# Altium PCB PCB.PcbDoc
Units mm, origin at the board's own origin, x right, y up, seen from the top; angles counter-clockwise.
Board outline 71 x 108 mm, 2 copper layers (Top Layer, Bottom Layer), stack 1.571 mm thick; 8 components, 66 nets, 302 pads, 0 vias.
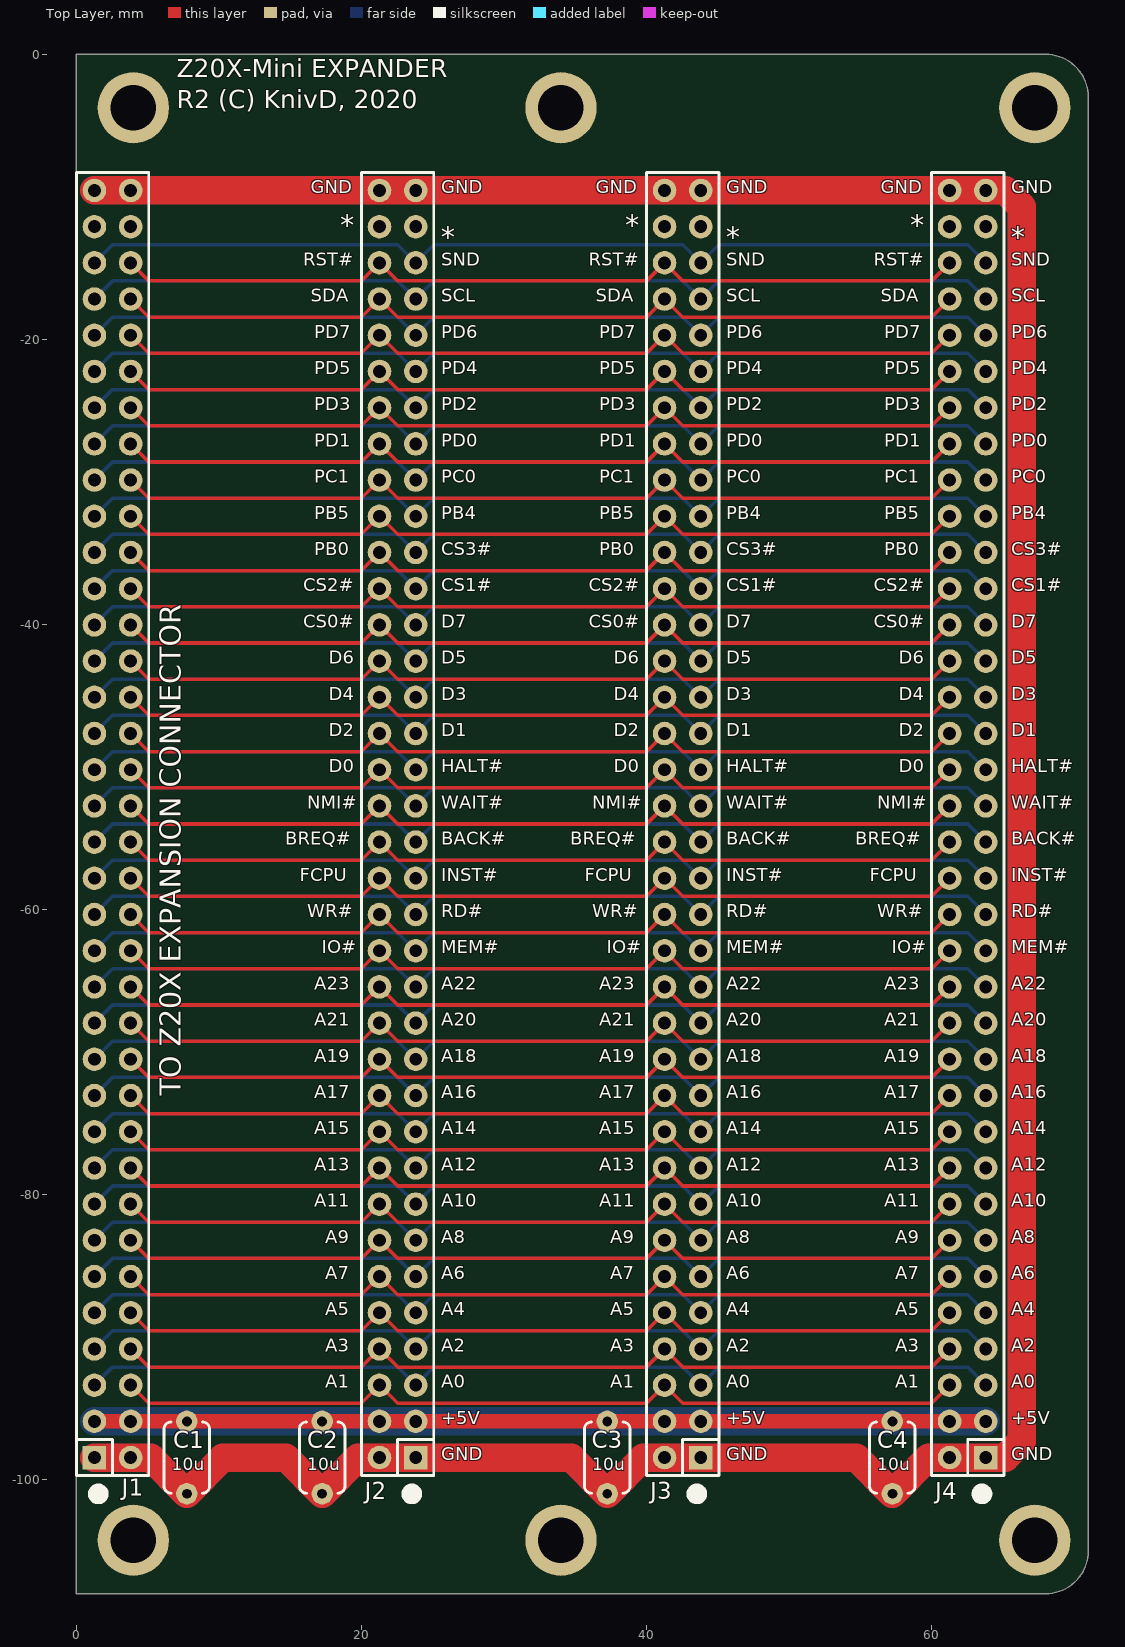
[diagram p0: Top Layer view]
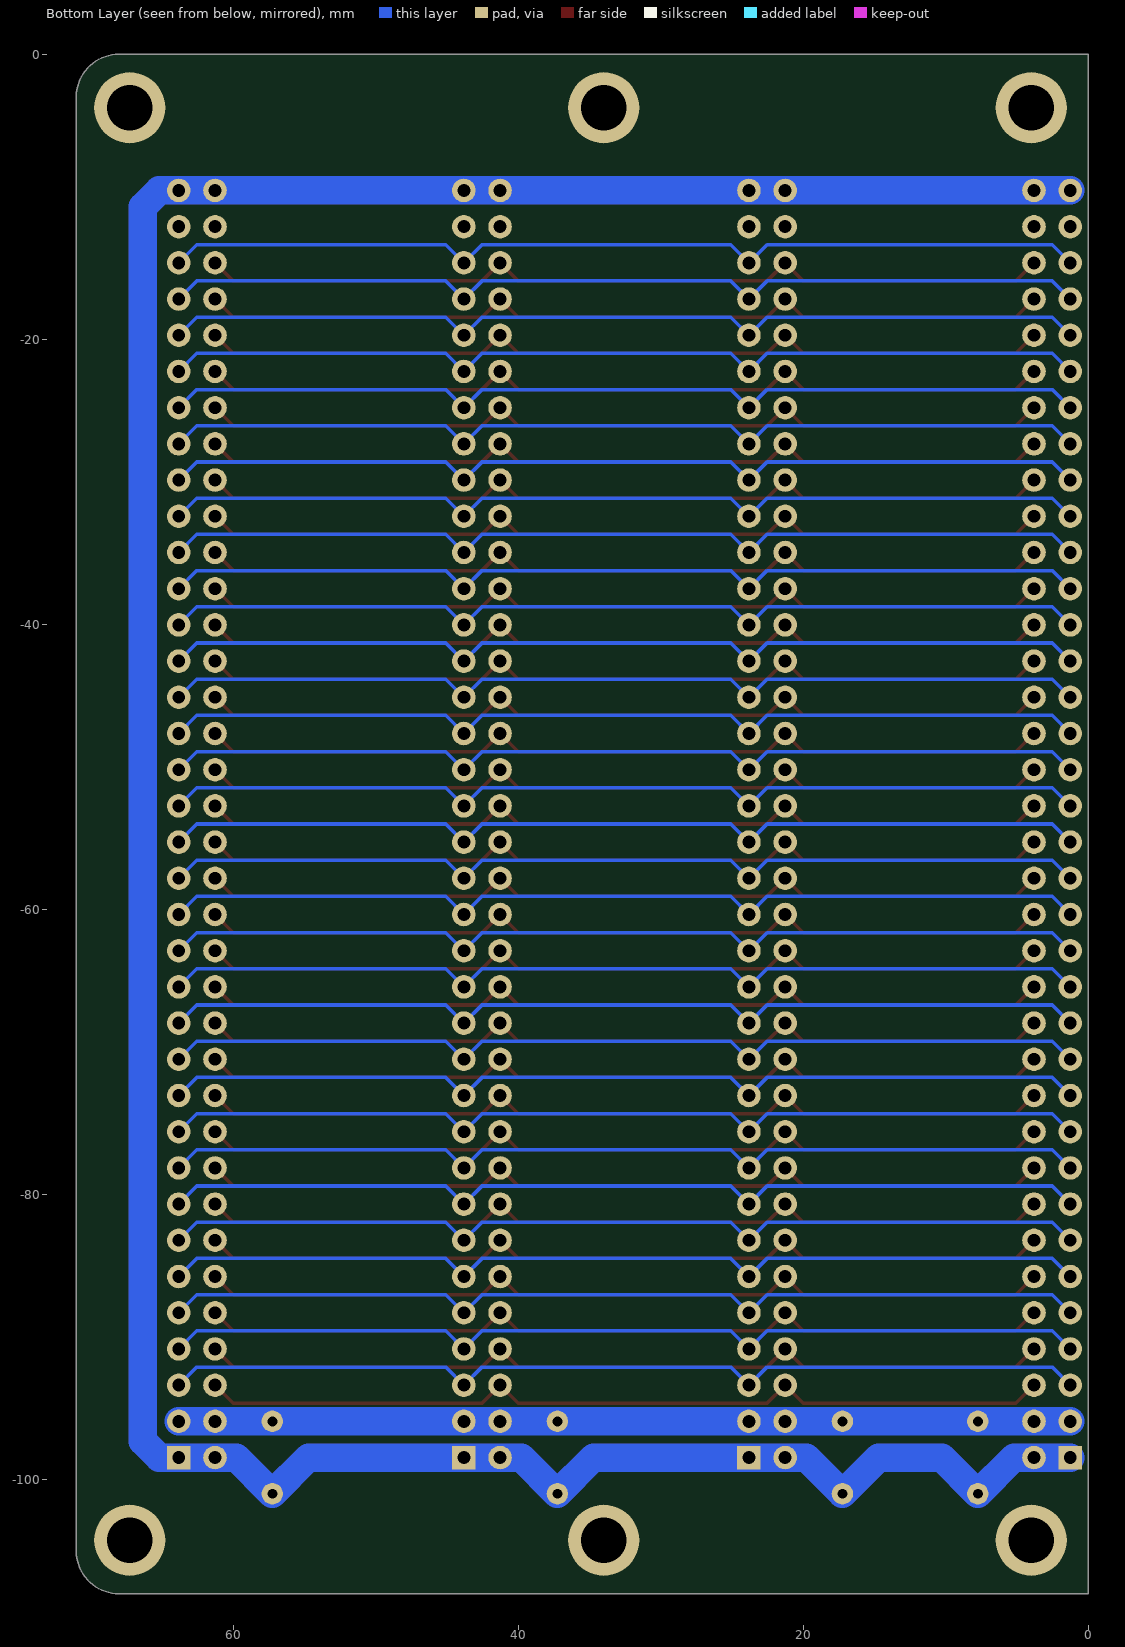
[diagram p1: Bottom Layer view, seen from below]

## Layer stack, top to bottom
Top Solder: solder mask 0.0102, Solder Resist, Dk 3.5
Top Layer: signal copper 0.0356
Dielectric 1: core 1.5, FR-4, Dk 4.2
Bottom Layer: signal copper 0.0356
Solder Side: solder mask 0.0102, Solder Resist, Dk 3.5

## Board outline
0,-108 68,-108 ccw(c68,-105) 71,-105 71,-3 ccw(c68,-3) 68,0 0,0

## Design rules (kind name [scope] priority, off if disabled: settings)
Clearance Clearance_U1 [(InComponent('U1') OR InComponent('U2') OR InComponent('U3'))] p1: gap=0.2 ignorepadtopadclearanceinfootprint=TRUE
Clearance Clearance_Poly [(IsRegion)] p2: gap=0.5 ignorepadtopadclearanceinfootprint=TRUE
Clearance [All] p3: gap=0.25 ignorepadtopadclearanceinfootprint=TRUE
DiffPairsRouting [All] p1: maxlimit=1 minlimit=0.15 mostfreqgap=0.2 toplayer_minwidth=0.2 toplayer_maxwidth=1 toplayer_prefwidth=0.2 bottomlayer_minwidth=0.2 bottomlayer_maxwidth=1 bottomlayer_prefwidth=0.2 maxuncoupledlength=12.7
HoleSize [All] p1 off: absolutevalues=TRUE maxlimit=2.5 minlimit=0.025 maxpercent=80.000 minpercent=20.000
HoleToHoleClearance [All] p1 off: gap=0 allowstackedmicrovias=TRUE
LayerPairs [All] p1 off: enforce=TRUE
MaxMinImpedance [InNet('ANT50R')] p1: minimum=49.90 maximum=50.10
MinimumSolderMaskSliver [All] p1 off: minsoldermaskwidth=-50
NetAntennae [All] p1 off: netantennaetolerance=0
PlaneClearance [All] p1: clearance=0.5
PlaneConnect [All] p1: planeconnectstyle=Direct reliefexpansion=0.5 reliefentries=4 reliefconductorwidth=0.35 reliefairgap=0.35
PolygonConnect [All] p1: thpad.connectstyle=Relief thpad.reliefconductorwidth=0.25 thpad.reliefentries=4 thpad.polygonreliefangle="90 Angle" thpad.airgapwidth=0.35 smdpad.connectstyle=Relief smdpad.reliefconductorwidth=0.25 smdpad.reliefentries=4 smdpad.polygonreliefangle="90 Angle" smdpad.airgapwidth=0.35 via.connectstyle=Direct via.reliefconductorwidth=0.35 via.reliefentries=4 via.polygonreliefangle="90 Angle" via.airgapwidth=0.35
RoutingCorners [All] p1: cornerstyle=45-Degree minsetback=2 maxsetback=2
RoutingVias [All] p1: holewidth=0.3 width=0.6 viastyle="Through Hole" minholewidth=0.3 minwidth=0.6 maxholewidth=1 maxwidth=2
SilkToBoardRegionClearance [All] p1 off:
SilkToSilkClearance [All] p1 off: silktosilkclearance=-50
SilkToSolderMaskClearance [IsPad] p1 off: minsilkscreentomaskgap=-50 clearancetoexposedcopper=TRUE
SolderMaskExpansion [All] p1: expansion=0.102
Width [All] p1: maxlimit=5 minlimit=0.2 preferedwidth=0.25
18 further rules are at their usual default settings.

## Components (designator, comment, footprint, x,y, rotation, side; value= is the part's Value field where it differs from the comment)
C1 "10u" CAPRR508-350X500X500 7.75,-98.45 r270 top locked
C2 "10u" CAPRR508-350X500X500 17.25,-98.45 r270 top locked
C3 "10u" CAPRR508-350X500X500 37.25,-98.45 r270 top locked
C4 "10u" CAPRR508-350X500X500 57.25,-98.45 r270 top locked
J1 "" 2011-2X36S-F#1 2.54,-54 r90 top locked
J2 "" 2011-2X36S-F#2 22.54,-54 r90 top locked
J3 "" 2011-2X36S-F#2 42.54,-54 r90 top locked
J4 "" 2011-2X36S-F#2 62.54,-54 r90 top locked

## Footprints (in the part's own frame and the unit in brackets; to place one, negate y for a bottom-side part, rotate by r counter-clockwise, add the part's x,y. Pads: shape width x height; smd on the part's side, far side on the other; paste and mask are expansions set on the pad)
2011-2X36S-F#1 [mil] "2011-2X36 Straight Pin Header"
  rect 65x65 hole 35.43: 1(-1750,50)
  round 65 hole 35.43: 2(-1750,-50) 3(-1650,50) 4(-1650,-50) 5(-1550,50) 6(-1550,-50) 7(-1450,50) 8(-1450,-50) 9(-1350,50) 10(-1350,-50) 11(-1250,50) 12(-1250,-50) 13(-1150,50) 14(-1150,-50) 15(-1050,50) 16(-1050,-50) 17(-950,50) 18(-950,-50) 19(-850,50) 20(-850,-50) 21(-750,50) 22(-750,-50) 23(-650,50) 24(-650,-50) 25(-550,50) 26(-550,-50) 27(-450,50) 28(-450,-50) 29(-350,50) 30(-350,-50) 31(-250,50) 32(-250,-50) 33(-150,50) 34(-150,-50) 35(-50,50) 36(-50,-50) 37(50,50) 38(50,-50) 39(150,50) 40(150,-50) 41(250,50) 42(250,-50) 43(350,50) 44(350,-50) 45(450,50) 46(450,-50) 47(550,50) 48(550,-50) 49(650,50) 50(650,-50) 51(750,50) 52(750,-50) 53(850,50) 54(850,-50) 55(950,50) 56(950,-50) 57(1050,50) 58(1050,-50) 59(1150,50) 60(1150,-50) 61(1250,50) 62(1250,-50) 63(1350,50) 64(1350,-50) 65(1450,50) 66(1450,-50) 67(1550,50) 68(1550,-50) 69(1650,50) 70(1650,-50) 71(1750,50) 72(1750,-50)
  silkscreen extent -1800,-100 1800,100, body extent -1810,-98 1810,98, height 118
2011-2X36S-F#2 [mil] "2011-2X36 Straight Pin Header"
  rect 65x65 hole 35.43: 1(-1750,-50)
  round 65 hole 35.43: 2(-1750,50) 3(-1650,-50) 4(-1650,50) 5(-1550,-50) 6(-1550,50) 7(-1450,-50) 8(-1450,50) 9(-1350,-50) 10(-1350,50) 11(-1250,-50) 12(-1250,50) 13(-1150,-50) 14(-1150,50) 15(-1050,-50) 16(-1050,50) 17(-950,-50) 18(-950,50) 19(-850,-50) 20(-850,50) 21(-750,-50) 22(-750,50) 23(-650,-50) 24(-650,50) 25(-550,-50) 26(-550,50) 27(-450,-50) 28(-450,50) 29(-350,-50) 30(-350,50) 31(-250,-50) 32(-250,50) 33(-150,-50) 34(-150,50) 35(-50,-50) 36(-50,50) 37(50,-50) 38(50,50) 39(150,-50) 40(150,50) 41(250,-50) 42(250,50) 43(350,-50) 44(350,50) 45(450,-50) 46(450,50) 47(550,-50) 48(550,50) 49(650,-50) 50(650,50) 51(750,-50) 52(750,50) 53(850,-50) 54(850,50) 55(950,-50) 56(950,50) 57(1050,-50) 58(1050,50) 59(1150,-50) 60(1150,50) 61(1250,-50) 62(1250,50) 63(1350,-50) 64(1350,50) 65(1450,-50) 66(1450,50) 67(1550,-50) 68(1550,50) 69(1650,-50) 70(1650,50) 71(1750,-50) 72(1750,50)
  silkscreen extent -1800,-100 1800,100, body extent -1810,-98 1810,98, height 335
CAPRR508-350X500X500 [mm] "Capacitor Radial Rounded, Pin spacing 5.08mm - Body With 3.2mm X Body Length 5.0mm X Body Height 5.0mm"
  round 1.5 hole 0.7: 1(-2.54,0) 2(2.54,0)
  silkscreen extent -2.5,-1.6 2.5,1.6, body extent -2.79,-1.75 2.79,1.75, height 5

## Part data
C1 C2 C3 C4: library part Capacitor, "Capacitor"
J1 J2 J3 J4: library part "Connector 2x36", "Dual row, 72-way connector"

## Free pads (board coordinates)
  round 5 hole 3.2: 0(4,-104.25) 0(4,-3.75) 0(34,-104.25) 0(34,-3.75) 0(67.25,-104.25) 0(67.25,-3.75)

## Nets (pads, with @x,y where several pads share a name; then routed paths per layer and width w, separated by ;. In a path a pad name is that pad's centre, name@x,y a point inside that pad or via, vN(x,y) a via of type N, cw(c..) or ccw(c..) an arc to the next point about the centre after c; other vN are vias at no path point)
+5V0: C1.1 C2.1 C3.1 C4.1 J1.3 J1.4 J2.3 J2.4 J3.3 J3.4 J4.3 J4.4 | length 125.1
  Top Layer w1: J1.3 J1.4 C1.1 C2.1 J2.4 J2.3 C3.1 J3.4 J3.3 C4.1 J4.4 J4.3
  Bottom Layer w2: J1.3 J1.4 C1.1 C2.1 J2.4 J2.3 C3.1 J3.4 J3.3 C4.1 J4.4 J4.3
A0: J1.5 J2.5 J3.5 J4.5 | length 65.7
  Bottom Layer w0.25: J1.5 2.54,-92.1 22.54,-92.1 J2.5 25.08,-92.1 42.54,-92.1 J3.5 45.08,-92.1 62.54,-92.1 J4.5
A1: J1.6 J2.6 J3.6 J4.6 | length 60.6
  Top Layer w0.25: J1.6 5.08,-94.64 20,-94.64 J2.6 22.54,-94.64 40,-94.64 J3.6 42.54,-94.64 60,-94.64 J4.6
A2: J1.7 J2.7 J3.7 J4.7 | length 65.7
  Bottom Layer w0.25: J1.7 2.54,-89.56 22.54,-89.56 J2.7 25.08,-89.56 42.54,-89.56 J3.7 45.08,-89.56 62.54,-89.56 J4.7
A3: J1.8 J2.8 J3.8 J4.8 | length 60.6
  Top Layer w0.25: J1.8 5.08,-92.1 20,-92.1 J2.8 22.54,-92.1 40,-92.1 J3.8 42.54,-92.1 60,-92.1 J4.8
A4: J1.9 J2.9 J3.9 J4.9 | length 65.7
  Bottom Layer w0.25: J1.9 2.54,-87.02 22.54,-87.02 J2.9 25.08,-87.02 42.54,-87.02 J3.9 45.08,-87.02 62.54,-87.02 J4.9
A5: J1.10 J2.10 J3.10 J4.10 | length 60.6
  Top Layer w0.25: J1.10 5.08,-89.56 20,-89.56 J2.10 22.54,-89.56 40,-89.56 J3.10 42.54,-89.56 60,-89.56 J4.10
A6: J1.11 J2.11 J3.11 J4.11 | length 65.7
  Bottom Layer w0.25: J1.11 2.54,-84.48 22.54,-84.48 J2.11 25.08,-84.48 42.54,-84.48 J3.11 45.08,-84.48 62.54,-84.48 J4.11
A7: J1.12 J2.12 J3.12 J4.12 | length 60.6
  Top Layer w0.25: J1.12 5.08,-87.02 20,-87.02 J2.12 22.54,-87.02 40,-87.02 J3.12 42.54,-87.02 60,-87.02 J4.12
A8: J1.13 J2.13 J3.13 J4.13 | length 65.8
  Top Layer w0.25: J4.13 J4.13@63.85,-83.25
  Bottom Layer w0.25: J1.13 2.54,-81.94 22.54,-81.94 J2.13 25.08,-81.94 42.54,-81.94 J3.13 45.08,-81.94 62.54,-81.94 J4.13
A9: J1.14 J2.14 J3.14 J4.14 | length 60.6
  Top Layer w0.25: J1.14 5.08,-84.48 20,-84.48 J2.14 22.54,-84.48 40,-84.48 J3.14 42.54,-84.48 60,-84.48 J4.14
A10: J1.15 J2.15 J3.15 J4.15 | length 65.7
  Bottom Layer w0.25: J1.15 2.54,-79.4 22.54,-79.4 J2.15 25.08,-79.4 42.54,-79.4 J3.15 45.08,-79.4 62.54,-79.4 J4.15
A11: J1.16 J2.16 J3.16 J4.16 | length 60.6
  Top Layer w0.25: J1.16 5.08,-81.94 20,-81.94 J2.16 22.54,-81.94 40,-81.94 J3.16 42.54,-81.94 60,-81.94 J4.16
A12: J1.17 J2.17 J3.17 J4.17 | length 65.7
  Bottom Layer w0.25: J1.17 2.54,-76.86 22.54,-76.86 J2.17 25.08,-76.86 42.54,-76.86 J3.17 45.08,-76.86 62.54,-76.86 J4.17
A13: J1.18 J2.18 J3.18 J4.18 | length 60.6
  Top Layer w0.25: J1.18 5.08,-79.4 20,-79.4 J2.18 22.54,-79.4 40,-79.4 J3.18 42.54,-79.4 60,-79.4 J4.18
A14: J1.19 J2.19 J3.19 J4.19 | length 65.7
  Bottom Layer w0.25: J1.19 2.54,-74.32 22.54,-74.32 J2.19 25.08,-74.32 42.54,-74.32 J3.19 45.08,-74.32 62.54,-74.32 J4.19
A15: J1.20 J2.20 J3.20 J4.20 | length 60.6
  Top Layer w0.25: J1.20 5.08,-76.86 20,-76.86 J2.20 22.54,-76.86 40,-76.86 J3.20 42.54,-76.86 60,-76.86 J4.20
A16: J1.21 J2.21 J3.21 J4.21 | length 65.7
  Bottom Layer w0.25: J1.21 2.54,-71.78 22.54,-71.78 J2.21 25.08,-71.78 42.54,-71.78 J3.21 45.08,-71.78 62.54,-71.78 J4.21
A17: J1.22 J2.22 J3.22 J4.22 | length 60.6
  Top Layer w0.25: J1.22 5.08,-74.32 20,-74.32 J2.22 22.54,-74.32 40,-74.32 J3.22 42.54,-74.32 60,-74.32 J4.22
A18: J1.23 J2.23 J3.23 J4.23 | length 65.7
  Bottom Layer w0.25: J1.23 2.54,-69.24 22.54,-69.24 J2.23 25.08,-69.24 42.54,-69.24 J3.23 45.08,-69.24 62.54,-69.24 J4.23
A19: J1.24 J2.24 J3.24 J4.24 | length 60.6
  Top Layer w0.25: J1.24 5.08,-71.78 20,-71.78 J2.24 22.54,-71.78 40,-71.78 J3.24 42.54,-71.78 60,-71.78 J4.24
A20: J1.25 J2.25 J3.25 J4.25 | length 66
  Top Layer w0.25: J4.25 J4.25@64.105,-67.97
  Bottom Layer w0.25: J1.25 2.54,-66.7 22.54,-66.7 J2.25 25.08,-66.7 42.54,-66.7 J3.25 45.08,-66.7 62.54,-66.7 J4.25
A21: J1.26 J2.26 J3.26 J4.26 | length 60.6
  Top Layer w0.25: J1.26 5.08,-69.24 20,-69.24 J2.26 22.54,-69.24 40,-69.24 J3.26 42.54,-69.24 60,-69.24 J4.26
A22: J1.27 J2.27 J3.27 J4.27 | length 65.8
  Top Layer w0.25: J4.27 J4.27@63.88,-65.5
  Bottom Layer w0.25: J1.27 2.54,-64.16 22.54,-64.16 J2.27 25.08,-64.16 42.54,-64.16 J3.27 45.08,-64.16 62.54,-64.16 J4.27
A23: J1.28 J2.28 J3.28 J4.28 | length 60.6
  Top Layer w0.25: J1.28 5.08,-66.7 20,-66.7 J2.28 22.54,-66.7 40,-66.7 J3.28 42.54,-66.7 60,-66.7 J4.28
BACK#: J1.35 J2.35 J3.35 J4.35 | length 65.7
  Bottom Layer w0.25: J1.35 2.54,-54 22.54,-54 J2.35 25.08,-54 42.54,-54 J3.35 45.08,-54 62.54,-54 J4.35
BREQ#: J1.36 J2.36 J3.36 J4.36 | length 60.6
  Top Layer w0.25: J1.36 5.08,-56.54 20,-56.54 J2.36 22.54,-56.54 40,-56.54 J3.36 42.54,-56.54 60,-56.54 J4.36
CS0#: J1.48 J2.48 J3.48 J4.48 | length 60.6
  Top Layer w0.25: J1.48 5.08,-41.3 20,-41.3 J2.48 22.54,-41.3 40,-41.3 J3.48 42.54,-41.3 60,-41.3 J4.48
CS1#: J1.49 J2.49 J3.49 J4.49 | length 65.7
  Bottom Layer w0.25: J1.49 2.54,-36.22 22.54,-36.22 J2.49 25.08,-36.22 42.54,-36.22 J3.49 45.08,-36.22 62.54,-36.22 J4.49
CS2#: J1.50 J2.50 J3.50 J4.50 | length 60.6
  Top Layer w0.25: J1.50 5.08,-38.76 20,-38.76 J2.50 22.54,-38.76 40,-38.76 J3.50 42.54,-38.76 60,-38.76 J4.50
CS3#: J1.51 J2.51 J3.51 J4.51 | length 65.7
  Bottom Layer w0.25: J1.51 2.54,-33.68 22.54,-33.68 J2.51 25.08,-33.68 42.54,-33.68 J3.51 45.08,-33.68 62.54,-33.68 J4.51
D0: J1.40 J2.40 J3.40 J4.40 | length 60.6
  Top Layer w0.25: J1.40 5.08,-51.46 20,-51.46 J2.40 22.54,-51.46 40,-51.46 J3.40 42.54,-51.46 60,-51.46 J4.40
D1: J1.41 J2.41 J3.41 J4.41 | length 65.7
  Bottom Layer w0.25: J1.41 2.54,-46.38 22.54,-46.38 J2.41 25.08,-46.38 42.54,-46.38 J3.41 45.08,-46.38 62.54,-46.38 J4.41
D2: J1.42 J2.42 J3.42 J4.42 | length 60.6
  Top Layer w0.25: J1.42 5.08,-48.92 20,-48.92 J2.42 22.54,-48.92 40,-48.92 J3.42 42.54,-48.92 60,-48.92 J4.42
D3: J1.43 J2.43 J3.43 J4.43 | length 65.7
  Bottom Layer w0.25: J1.43 2.54,-43.84 22.54,-43.84 J2.43 25.08,-43.84 42.54,-43.84 J3.43 45.08,-43.84 62.54,-43.84 J4.43
D4: J1.44 J2.44 J3.44 J4.44 | length 60.6
  Top Layer w0.25: J1.44 5.08,-46.38 20,-46.38 J2.44 22.54,-46.38 40,-46.38 J3.44 42.54,-46.38 60,-46.38 J4.44
D5: J1.45 J2.45 J3.45 J4.45 | length 65.7
  Bottom Layer w0.25: J1.45 2.54,-41.3 22.54,-41.3 J2.45 25.08,-41.3 42.54,-41.3 J3.45 45.08,-41.3 62.54,-41.3 J4.45
D6: J1.46 J2.46 J3.46 J4.46 | length 60.6
  Top Layer w0.25: J1.46 5.08,-43.84 20,-43.84 J2.46 22.54,-43.84 40,-43.84 J3.46 42.54,-43.84 60,-43.84 J4.46
D7: J1.47 J2.47 J3.47 J4.47 | length 65.7
  Bottom Layer w0.25: J1.47 2.54,-38.76 22.54,-38.76 J2.47 25.08,-38.76 42.54,-38.76 J3.47 45.08,-38.76 62.54,-38.76 J4.47
FCPU: J1.34 J2.34 J3.34 J4.34 | length 60.6
  Top Layer w0.25: J1.34 5.08,-59.08 20,-59.08 J2.34 22.54,-59.08 40,-59.08 J3.34 42.54,-59.08 60,-59.08 J4.34
GND: C1.2 C2.2 C3.2 C4.2 J1.1 J1.2 J1.71 J1.72 J2.1 J2.2 J2.71 J2.72 J3.1 J3.2 J3.71 J3.72 J4.1 J4.2 J4.71 J4.72 | length 452.2
  Top Layer w2: J1.1 J1.2 5.21,-98.45 C1.2 10.29,-98.45 14.71,-98.45 C2.2 19.79,-98.45 J2.2 J2.1 34.71,-98.45 C3.2 39.79,-98.45 J3.2 J3.1 54.71,-98.45 C4.2 59.79,-98.45 J4.2 J4.1 65.175,-98.45 66.325,-97.3 66.325,-10.7 65.175,-9.55 J4.71 J4.72 J3.71 J3.72 J2.71 J2.72 J1.72 J1.71
  Bottom Layer w2: J1.1 J1.2 5.21,-98.45 C1.2 10.29,-98.45 14.71,-98.45 C2.2 19.79,-98.45 J2.2 J2.1 34.71,-98.45 C3.2 39.79,-98.45 J3.2 J3.1 54.71,-98.45 C4.2 59.79,-98.45 J4.2 J4.1 65.175,-98.45 66.325,-97.3 66.325,-10.7 65.175,-9.55 J4.71 J4.72 J3.71 J3.72 J2.71 J2.72 J1.72 J1.71
HALT#: J1.39 J2.39 J3.39 J4.39 | length 65.7
  Bottom Layer w0.25: J1.39 2.54,-48.92 22.54,-48.92 J2.39 25.08,-48.92 42.54,-48.92 J3.39 45.08,-48.92 62.54,-48.92 J4.39
INST#: J1.33 J2.33 J3.33 J4.33 | length 65.7
  Bottom Layer w0.25: J1.33 2.54,-56.54 22.54,-56.54 J2.33 25.08,-56.54 42.54,-56.54 J3.33 45.08,-56.54 62.54,-56.54 J4.33
IO#: J1.30 J2.30 J3.30 J4.30 | length 60.6
  Top Layer w0.25: J1.30 5.08,-64.16 20,-64.16 J2.30 22.54,-64.16 40,-64.16 J3.30 42.54,-64.16 60,-64.16 J4.30
MEM#: J1.29 J2.29 J3.29 J4.29 | length 65.7
  Bottom Layer w0.25: J1.29 2.54,-61.62 22.54,-61.62 J2.29 25.08,-61.62 42.54,-61.62 J3.29 45.08,-61.62 62.54,-61.62 J4.29
NMI#: J1.38 J2.38 J3.38 J4.38 | length 60.6
  Top Layer w0.25: J1.38 5.08,-54 20,-54 J2.38 22.54,-54 40,-54 J3.38 42.54,-54 60,-54 J4.38
PB0: J1.52 J2.52 J3.52 J4.52 | length 60.6
  Top Layer w0.25: J1.52 5.08,-36.22 20,-36.22 J2.52 22.54,-36.22 40,-36.22 J3.52 42.54,-36.22 60,-36.22 J4.52
PB4: J1.53 J2.53 J3.53 J4.53 | length 65.7
  Bottom Layer w0.25: J1.53 2.54,-31.14 22.54,-31.14 J2.53 25.08,-31.14 42.54,-31.14 J3.53 45.08,-31.14 62.54,-31.14 J4.53
PB5: J1.54 J2.54 J3.54 J4.54 | length 60.6
  Top Layer w0.25: J1.54 5.08,-33.68 20,-33.68 J2.54 22.54,-33.68 40,-33.68 J3.54 42.54,-33.68 60,-33.68 J4.54
PC0: J1.55 J2.55 J3.55 J4.55 | length 65.7
  Bottom Layer w0.25: J1.55 2.54,-28.6 22.54,-28.6 J2.55 25.08,-28.6 42.54,-28.6 J3.55 45.08,-28.6 62.54,-28.6 J4.55
PC1: J1.56 J2.56 J3.56 J4.56 | length 60.6
  Top Layer w0.25: J1.56 5.08,-31.14 20,-31.14 J2.56 22.54,-31.14 40,-31.14 J3.56 42.54,-31.14 60,-31.14 J4.56
PD0: J1.57 J2.57 J3.57 J4.57 | length 65.7
  Bottom Layer w0.25: J1.57 2.54,-26.06 22.54,-26.06 J2.57 25.08,-26.06 42.54,-26.06 J3.57 45.08,-26.06 62.54,-26.06 J4.57
PD1: J1.58 J2.58 J3.58 J4.58 | length 60.6
  Top Layer w0.25: J1.58 5.08,-28.6 20,-28.6 J2.58 22.54,-28.6 40,-28.6 J3.58 42.54,-28.6 60,-28.6 J4.58
PD2: J1.59 J2.59 J3.59 J4.59 | length 65.7
  Bottom Layer w0.25: J1.59 2.54,-23.52 22.54,-23.52 J2.59 25.08,-23.52 42.54,-23.52 J3.59 45.08,-23.52 62.54,-23.52 J4.59
PD3: J1.60 J2.60 J3.60 J4.60 | length 60.6
  Top Layer w0.25: J1.60 5.08,-26.06 20,-26.06 J2.60 22.54,-26.06 40,-26.06 J3.60 42.54,-26.06 60,-26.06 J4.60
PD4: J1.61 J2.61 J3.61 J4.61 | length 65.7
  Bottom Layer w0.25: J1.61 2.54,-20.98 22.54,-20.98 J2.61 25.08,-20.98 42.54,-20.98 J3.61 45.08,-20.98 62.54,-20.98 J4.61
PD5: J1.62 J2.62 J3.62 J4.62 | length 60.6
  Top Layer w0.25: J1.62 5.08,-23.52 20,-23.52 J2.62 22.54,-23.52 40,-23.52 J3.62 42.54,-23.52 60,-23.52 J4.62
PD6: J1.63 J2.63 J3.63 J4.63 | length 65.7
  Bottom Layer w0.25: J1.63 2.54,-18.44 22.54,-18.44 J2.63 25.08,-18.44 42.54,-18.44 J3.63 45.08,-18.44 62.54,-18.44 J4.63
PD7: J1.64 J2.64 J3.64 J4.64 | length 60.6
  Top Layer w0.25: J1.64 5.08,-20.98 20,-20.98 J2.64 22.54,-20.98 40,-20.98 J3.64 42.54,-20.98 60,-20.98 J4.64
RD#: J1.31 J2.31 J3.31 J4.31 | length 65.7
  Bottom Layer w0.25: J1.31 2.54,-59.08 22.54,-59.08 J2.31 25.08,-59.08 42.54,-59.08 J3.31 45.08,-59.08 62.54,-59.08 J4.31
RST#: J1.68 J2.68 J3.68 J4.68 | length 60.6
  Top Layer w0.25: J1.68 5.08,-15.9 20,-15.9 J2.68 22.54,-15.9 40,-15.9 J3.68 42.54,-15.9 60,-15.9 J4.68
SCL: J1.65 J2.65 J3.65 J4.65 | length 65.7
  Bottom Layer w0.25: J1.65 2.54,-15.9 22.54,-15.9 J2.65 25.08,-15.9 42.54,-15.9 J3.65 45.08,-15.9 62.54,-15.9 J4.65
SDA: J1.66 J2.66 J3.66 J4.66 | length 60.6
  Top Layer w0.25: J1.66 5.08,-18.44 20,-18.44 J2.66 22.54,-18.44 40,-18.44 J3.66 42.54,-18.44 60,-18.44 J4.66
SND: J1.67 J2.67 J3.67 J4.67 | length 65.7
  Bottom Layer w0.25: J1.67 2.54,-13.36 22.54,-13.36 J2.67 25.08,-13.36 42.54,-13.36 J3.67 45.08,-13.36 62.54,-13.36 J4.67
WAIT#: J1.37 J2.37 J3.37 J4.37 | length 65.7
  Bottom Layer w0.25: J1.37 2.54,-51.46 22.54,-51.46 J2.37 25.08,-51.46 42.54,-51.46 J3.37 45.08,-51.46 62.54,-51.46 J4.37
WR#: J1.32 J2.32 J3.32 J4.32 | length 60.6
  Top Layer w0.25: J1.32 5.08,-61.62 20,-61.62 J2.32 22.54,-61.62 40,-61.62 J3.32 42.54,-61.62 60,-61.62 J4.32
pads on no net: J1.69 J1.70 J2.69 J2.70 J3.69 J3.70 J4.69 J4.70

## Silkscreen, mask and mechanical layers (free items; w line width, h text height)
Top Overlay:
  circle w0.75: c1.54,-101 r0.35
  circle w0.75: c23.54,-101 r0.35
  circle w0.75: c43.54,-101 r0.35
  circle w0.75: c63.54,-101 r0.35
  text "Z20X-Mini EXPANDER / R2 (C) KnivD, 2020" at 7.046,-4.216 h2.2
  text "GND" at 16.444,-10.058 h1.6
  text "GND" at 25.588,-10.058 h1.6
  text "GND" at 36.444,-10.058 h1.6
  text "GND" at 45.588,-10.058 h1.6
  text "GND" at 56.444,-10.058 h1.6
  text "GND" at 65.588,-10.058 h1.6
  text "*" at 26.574,-10.957 h2.5 r180
  text "*" at 46.574,-10.957 h2.5 r180
  text "*" at 66.574,-10.957 h2.5 r180
  text "*" at 18.506,-13.223 h2.5
  text "*" at 38.506,-13.223 h2.5
  text "*" at 58.506,-13.223 h2.5
  text "RST#" at 15.936,-15.138 h1.6
  text "SND" at 25.588,-15.138 h1.6
  text "RST#" at 35.936,-15.138 h1.6
  text "SND" at 45.588,-15.138 h1.6
  text "RST#" at 55.936,-15.138 h1.6
  text "SND" at 65.588,-15.138 h1.6
  text "SDA" at 16.444,-17.678 h1.6
  text "SCL" at 25.588,-17.678 h1.6
  text "SDA" at 36.444,-17.678 h1.6
  text "SCL" at 45.588,-17.678 h1.6
  text "SDA" at 56.444,-17.678 h1.6
  text "SCL" at 65.588,-17.678 h1.6
  text "PD7" at 16.698,-20.218 h1.6
  text "PD6" at 25.588,-20.218 h1.6
  text "PD7" at 36.698,-20.218 h1.6
  text "PD6" at 45.588,-20.218 h1.6
  text "PD7" at 56.698,-20.218 h1.6
  text "PD6" at 65.588,-20.218 h1.6
  text "PD5" at 16.698,-22.758 h1.6
  text "PD4" at 25.588,-22.758 h1.6
  text "PD5" at 36.698,-22.758 h1.6
  text "PD4" at 45.588,-22.758 h1.6
  text "PD5" at 56.698,-22.758 h1.6
  text "PD4" at 65.588,-22.758 h1.6
  text "PD3" at 16.698,-25.298 h1.6
  text "PD2" at 25.588,-25.298 h1.6
  text "PD3" at 36.698,-25.298 h1.6
  text "PD2" at 45.588,-25.298 h1.6
  text "PD3" at 56.698,-25.298 h1.6
  text "PD2" at 65.588,-25.298 h1.6
  text "PD1" at 16.698,-27.838 h1.6
  text "PD0" at 25.588,-27.838 h1.6
  text "PD1" at 36.698,-27.838 h1.6
  text "PD0" at 45.588,-27.838 h1.6
  text "PD1" at 56.698,-27.838 h1.6
  text "PD0" at 65.588,-27.838 h1.6
  text "PC1" at 16.698,-30.378 h1.6
  text "PC0" at 25.588,-30.378 h1.6
  text "PC1" at 36.698,-30.378 h1.6
  text "PC0" at 45.588,-30.378 h1.6
  text "PC1" at 56.698,-30.378 h1.6
  text "PC0" at 65.588,-30.378 h1.6
  text "PB5" at 16.698,-32.918 h1.6
  text "PB4" at 25.588,-32.918 h1.6
  text "PB5" at 36.698,-32.918 h1.6
  text "PB4" at 45.588,-32.918 h1.6
  text "PB5" at 56.698,-32.918 h1.6
  text "PB4" at 65.588,-32.918 h1.6
  text "PB0" at 16.698,-35.458 h1.6
  text "CS3#" at 25.588,-35.458 h1.6
  text "PB0" at 36.698,-35.458 h1.6
  text "CS3#" at 45.588,-35.458 h1.6
  text "PB0" at 56.698,-35.458 h1.6
  text "CS3#" at 65.588,-35.458 h1.6
  text "CS2#" at 15.936,-37.998 h1.6
  text "CS1#" at 25.588,-37.998 h1.6
  text "CS2#" at 35.936,-37.998 h1.6
  text "CS1#" at 45.588,-37.998 h1.6
  text "CS2#" at 55.936,-37.998 h1.6
  text "CS1#" at 65.588,-37.998 h1.6
  text "CS0#" at 15.936,-40.538 h1.6
  text "D7" at 25.588,-40.538 h1.6
  text "CS0#" at 35.936,-40.538 h1.6
  text "D7" at 45.588,-40.538 h1.6
  text "CS0#" at 55.936,-40.538 h1.6
  text "D7" at 65.588,-40.538 h1.6
  text "D6" at 17.714,-43.078 h1.6
  text "D5" at 25.588,-43.078 h1.6
  text "D6" at 37.714,-43.078 h1.6
  text "D5" at 45.588,-43.078 h1.6
  text "D6" at 57.714,-43.078 h1.6
  text "D5" at 65.588,-43.078 h1.6
  text "D4" at 17.714,-45.618 h1.6
  text "D3" at 25.588,-45.618 h1.6
  text "D4" at 37.714,-45.618 h1.6
  text "D3" at 45.588,-45.618 h1.6
  text "D4" at 57.714,-45.618 h1.6
  text "D3" at 65.588,-45.618 h1.6
  text "D2" at 17.714,-48.158 h1.6
  text "D1" at 25.588,-48.158 h1.6
  text "D2" at 37.714,-48.158 h1.6
  text "D1" at 45.588,-48.158 h1.6
  text "D2" at 57.714,-48.158 h1.6
  text "D1" at 65.588,-48.158 h1.6
  text "D0" at 17.714,-50.698 h1.6
  text "HALT#" at 25.588,-50.698 h1.6
  text "D0" at 37.714,-50.698 h1.6
  text "HALT#" at 45.588,-50.698 h1.6
  text "D0" at 57.714,-50.698 h1.6
  text "HALT#" at 65.588,-50.698 h1.6
  text "NMI#" at 16.19,-53.238 h1.6
  text "WAIT#" at 25.588,-53.238 h1.6
  text "NMI#" at 36.19,-53.238 h1.6
  text "WAIT#" at 45.588,-53.238 h1.6
  text "NMI#" at 56.19,-53.238 h1.6
  text "WAIT#" at 65.588,-53.238 h1.6
  text "BREQ#" at 14.666,-55.778 h1.6
  text "BACK#" at 25.588,-55.778 h1.6
  text "BREQ#" at 34.666,-55.778 h1.6
  text "BACK#" at 45.588,-55.778 h1.6
  text "BREQ#" at 54.666,-55.778 h1.6
  text "BACK#" at 65.588,-55.778 h1.6
  text "FCPU" at 15.682,-58.318 h1.6
  text "INST#" at 25.588,-58.318 h1.6
  text "FCPU" at 35.682,-58.318 h1.6
  text "INST#" at 45.588,-58.318 h1.6
  text "FCPU" at 55.682,-58.318 h1.6
  text "INST#" at 65.588,-58.318 h1.6
  text "WR#" at 16.19,-60.858 h1.6
  text "RD#" at 25.588,-60.858 h1.6
  text "WR#" at 36.19,-60.858 h1.6
  text "RD#" at 45.588,-60.858 h1.6
  text "WR#" at 56.19,-60.858 h1.6
  text "RD#" at 65.588,-60.858 h1.6
  text "IO#" at 17.206,-63.398 h1.6
  text "MEM#" at 25.588,-63.398 h1.6
  text "IO#" at 37.206,-63.398 h1.6
  text "MEM#" at 45.588,-63.398 h1.6
  text "IO#" at 57.206,-63.398 h1.6
  text "MEM#" at 65.588,-63.398 h1.6
  text "A23" at 16.698,-65.938 h1.6
  text "A22" at 25.588,-65.938 h1.6
  text "A23" at 36.698,-65.938 h1.6
  text "A22" at 45.588,-65.938 h1.6
  text "A23" at 56.698,-65.938 h1.6
  text "A22" at 65.588,-65.938 h1.6
  text "A21" at 16.698,-68.478 h1.6
  text "A20" at 25.588,-68.478 h1.6
  text "A21" at 36.698,-68.478 h1.6
  text "A20" at 45.588,-68.478 h1.6
  text "A21" at 56.698,-68.478 h1.6
  text "A20" at 65.588,-68.478 h1.6
  text "A19" at 16.698,-71.018 h1.6
  text "A18" at 25.588,-71.018 h1.6
  text "A19" at 36.698,-71.018 h1.6
  text "A18" at 45.588,-71.018 h1.6
  text "A19" at 56.698,-71.018 h1.6
  text "A18" at 65.588,-71.018 h1.6
  text "TO Z20X EXPANSION CONNECTOR" at 7.808,-73.05 h2.5 r90
  text "A17" at 16.698,-73.558 h1.6
  text "A16" at 25.588,-73.558 h1.6
  text "A17" at 36.698,-73.558 h1.6
  text "A16" at 45.588,-73.558 h1.6
  text "A17" at 56.698,-73.558 h1.6
  text "A16" at 65.588,-73.558 h1.6
  text "A15" at 16.698,-76.098 h1.6
  text "A14" at 25.588,-76.098 h1.6
  text "A15" at 36.698,-76.098 h1.6
  text "A14" at 45.588,-76.098 h1.6
  text "A15" at 56.698,-76.098 h1.6
  text "A14" at 65.588,-76.098 h1.6
  text "A13" at 16.698,-78.638 h1.6
  text "A12" at 25.588,-78.638 h1.6
  text "A13" at 36.698,-78.638 h1.6
  text "A12" at 45.588,-78.638 h1.6
  text "A13" at 56.698,-78.638 h1.6
  text "A12" at 65.588,-78.638 h1.6
  text "A11" at 16.698,-81.178 h1.6
  text "A10" at 25.588,-81.178 h1.6
  text "A11" at 36.698,-81.178 h1.6
  text "A10" at 45.588,-81.178 h1.6
  text "A11" at 56.698,-81.178 h1.6
  text "A10" at 65.588,-81.178 h1.6
  text "A9" at 17.46,-83.718 h1.6
  text "A8" at 25.588,-83.718 h1.6
  text "A9" at 37.46,-83.718 h1.6
  text "A8" at 45.588,-83.718 h1.6
  text "A9" at 57.46,-83.718 h1.6
  text "A8" at 65.588,-83.718 h1.6
  text "A7" at 17.46,-86.258 h1.6
  text "A6" at 25.588,-86.258 h1.6
  text "A7" at 37.46,-86.258 h1.6
  text "A6" at 45.588,-86.258 h1.6
  text "A7" at 57.46,-86.258 h1.6
  text "A6" at 65.588,-86.258 h1.6
  text "A5" at 17.46,-88.798 h1.6
  text "A4" at 25.588,-88.798 h1.6
  text "A5" at 37.46,-88.798 h1.6
  text "A4" at 45.588,-88.798 h1.6
  text "A5" at 57.46,-88.798 h1.6
  text "A4" at 65.588,-88.798 h1.6
  text "A3" at 17.46,-91.338 h1.6
  text "A2" at 25.588,-91.338 h1.6
  text "A3" at 37.46,-91.338 h1.6
  text "A2" at 45.588,-91.338 h1.6
  text "A3" at 57.46,-91.338 h1.6
  text "A2" at 65.588,-91.338 h1.6
  text "A1" at 17.46,-93.878 h1.6
  text "A0" at 25.588,-93.878 h1.6
  text "A1" at 37.46,-93.878 h1.6
  text "A0" at 45.588,-93.878 h1.6
  text "A1" at 57.46,-93.878 h1.6
  text "A0" at 65.588,-93.878 h1.6
  text "+5V" at 25.588,-96.418 h1.6
  text "+5V" at 45.588,-96.418 h1.6
  text "+5V" at 65.588,-96.418 h1.6
  text "GND" at 25.588,-98.958 h1.6
  text "GND" at 45.588,-98.958 h1.6
  text "GND" at 65.588,-98.958 h1.6
Mechanical 1:
  the board outline again, w0.35